# Altium PCB 1.PcbDoc
Units mm, origin at the board's own origin, x right, y up, seen from the top; angles counter-clockwise.
Board outline 89.03 x 17.27 mm, 2 copper layers (Top Layer, Bottom Layer); 10 components, 9 nets, 31 pads, 0 vias.
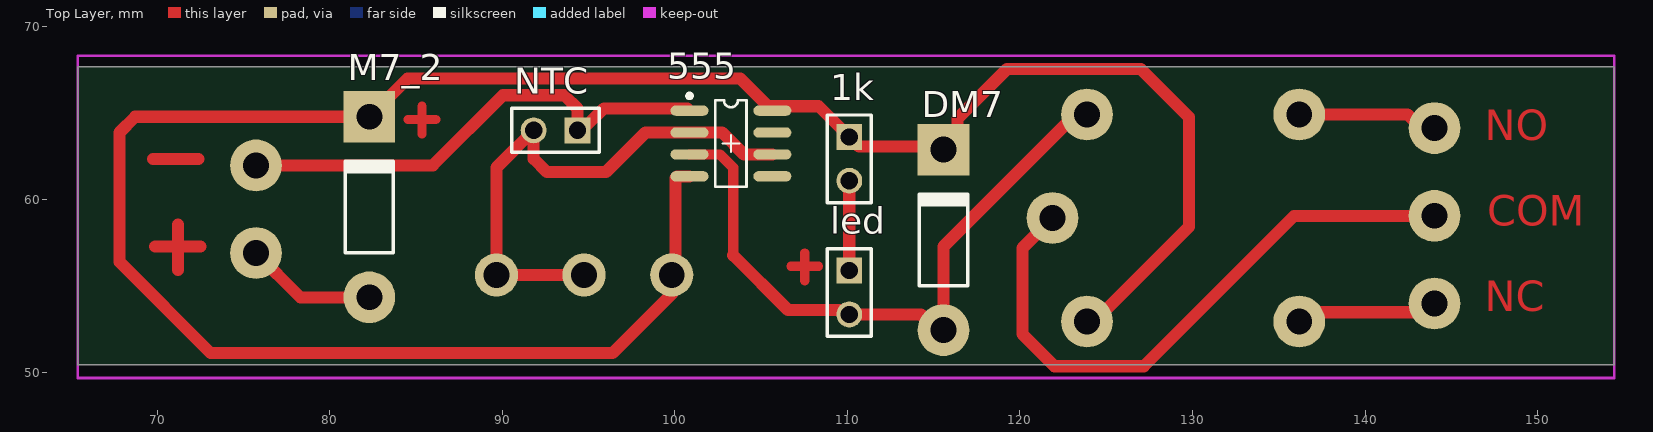
[diagram p0: Top Layer view]
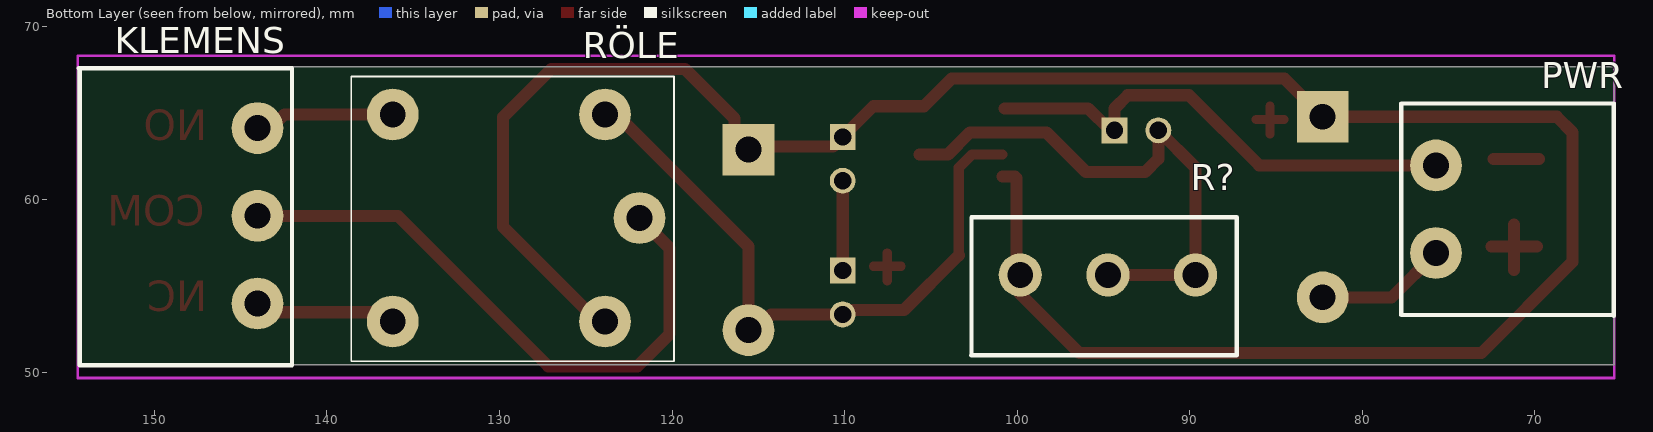
[diagram p1: Bottom Layer view, seen from below]
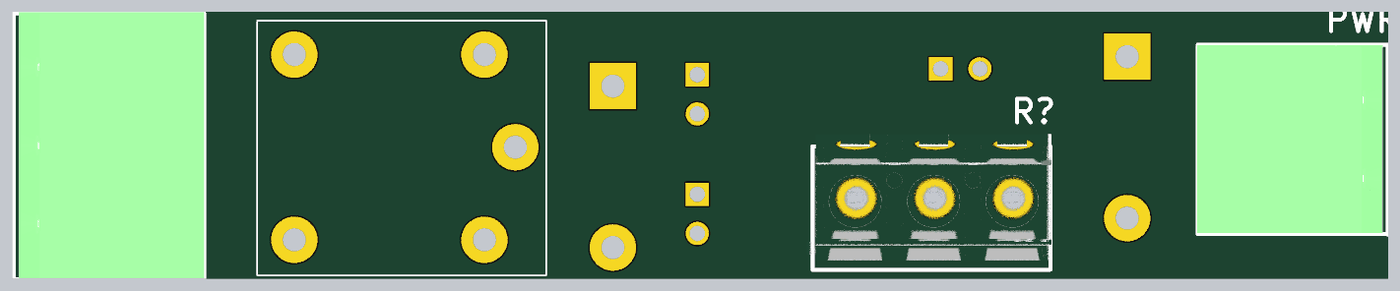
[diagram p2: 3D render of the assembled board from below, using the file's embedded part models]

## Layer stack, top to bottom
Top Solder: solder mask 0.0102, Solder Resist, Dk 3.5
Top Layer: signal copper 0.0356
Dielectric 1: dielectric 0.32, FR-4, Dk 4.8
Bottom Layer: signal copper 0.0356
Bottom Solder: solder mask 0.0102, Solder Resist, Dk 3.5

## Board outline
65.405,50.419 154.432,50.419 154.432,67.691 65.405,67.691

## Design rules (kind name [scope] priority, off if disabled: settings)
Clearance [All] p1: gap=0.254 ignorepadtopadclearanceinfootprint=FALSE except(0: Arc-Hole Track-Hole SMDPad-Hole THPad-Hole Via-Hole Fill-Hole Poly-Hole Region-Hole Text-Hole)
PolygonConnect [All] p1: connectstyle=Relief reliefconductorwidth=0.254 reliefentries=4 polygonreliefangle="90 Angle" airgapwidth=0.254
RoutingVias [All] p1: holewidth=0.711 width=1.27 viastyle="Through Hole" minholewidth=0.711 minwidth=1.27 maxholewidth=0.711 maxwidth=1.27
SolderMaskExpansion [All] p1: expansion=0.102
Width [All] p1: maxlimit=1 minlimit=0.3 preferedwidth=0.5 minimp=50.000000 maximp=50.000000 favimp=50.000000
30 further rules are at their usual default settings.

## Components (designator, comment, footprint, x,y, rotation, side; value= is the part's Value field where it differs from the comment)
1k "Header 2" HDR1X2 110.109,63.627 r270 top
555 "=Value" SOIC8 103.251,63.246 r270 top
DM7 "Diode 1N4004" DO-41 115.57,57.658 r90 top
KLEMENS "Header 3" "3R 5.08 Geçmeli Klemens" 144.018,59.055 r0 bottom
led "Header 2" HDR1X2 110.109,55.88 r270 top
M7_2 "Diode 1N4004" DO-41 82.296,59.563 r90 top
NTC "Header 2" HDR1X2 94.361,64.008 r180 top
PWR "Header 2" "2R 5.08 GEÇMELÝ" 73.66,59.436 r0 bottom
R? "10K" "3r 5.08 o nolu" 94.742,55.626 r0 bottom
RÖLE "=Value" "RELAY KUP" 129.032,58.928 r0 bottom

## Footprints (in the part's own frame and the unit in brackets; to place one, negate y for a bottom-side part, rotate by r counter-clockwise, add the part's x,y. Pads: shape width x height; smd on the part's side, far side on the other; paste and mask are expansions set on the pad)
"2R 5.08 GEÇMELÝ" [mm]
  round 3 hole 1.5: 1(2.075,-2.54) 2(2.075,2.54)
  silkscreen extent -8.23,-6.13 4.08,6.17, body extent -7.9,-6.08 4.1,6.08, height 8.6
"3R 5.08 Geçmeli Klemens" [mm]
  round 3 hole 1.5: 1(0,5.08) 2(0,0) 3(0,-5.08)
  silkscreen extent -2,-8.54 10.35,8.67, body extent -2,-8.62 10,8.62, height 8.6
"3r 5.08 o nolu" [mm]
  round 2.5 hole 1.5: 1(5.08,0) 2(0,0) 3(-5.08,0)
  silkscreen extent -7.47,-3.36 7.91,4.64, body extent -7.54,-4.15 8.3,4.05, height 10.25
DO-41 [mm] "Diode, Axial; Body 5.2 x 2.7 mm (LxDia. max), Lead Dia. 0.86 mm (max)"
  round 3 hole 1.5: 1(-5.23,0)
  rect 3x3 hole 1.5: 2(5.23,0)
  silkscreen extent -2.65,-1.4 2.75,1.4
HDR1X2 [mm] "Connector; Header; 2 Position"
  rect 1.5x1.5 hole 1: 1(0,0)
  round 1.5 hole 1: 2(2.54,0)
  silkscreen extent -1.27,-1.27 3.81,1.27
"RELAY KUP" [mm]
  round 3 hole 1.5: 1(-7.15,0) 2(7.15,6) 3(7.15,-6) 4(-5.15,-6) 5(-5.15,6)
  silkscreen extent -9.15,-8.2 9.55,8.3, body extent -9.1,-8.15 9.5,8.25, height 15
SOIC8 [mm]
  oval 0.6x2.2 smd: 1(-1.905,-2.4) 2(-0.635,-2.4) 3(0.635,-2.4) 4(1.905,-2.4) 5(1.905,2.4) 6(0.635,2.4) 7(-0.635,2.4) 8(-1.905,2.4)
  silkscreen extent -2.88,-2.52 2.5,0.9, body extent -2.43,-3.02 2.47,2.98, height 1.7

## Part data
1k led NTC PWR: "Header, 2-Pin", LatestRevisionDate=17-Jul-2002, LatestRevisionNote="Re-released for DXP Platform.", Publisher="Altium Limited"
555: library part H11IS0001, "NE555 IC-555 TIMER SMD SOIC8 ENTEGRE (ST-TEXAS-UTC)", Cari=H11IS0001, Component Name=NE555_SOIC8, Type=SMD
DM7 M7_2: "1 Amp General Purpose Rectifier", Code_JEDEC=DO-204-AL, ComponentLink1Description="Manufacturer Link", ComponentLink1URL=http://www.fairchildsemi.com/, ComponentLink2Description=Datasheet, ComponentLink2URL=http://www.fairchildsemi.com/ds/1N%2F1N4001.pdf, DatasheetVersion=1998, LatestRevisionDate=17-Jul-2002, LatestRevisionNote="Re-released for DXP Platform.", PackageDescription="Diode, Axial; Body 5.2 x 2.7 mm (LxDia. max), Lead Dia. 0.86 mm (max)", PackageReference=DO-41, PackageVersion=Aug-1999, Published=8-Jun-2000, Publisher="Altium Limited"
KLEMENS: "Header, 3-Pin", LatestRevisionDate=17-Jul-2002, LatestRevisionNote="Re-released for DXP Platform.", Publisher="Altium Limited"
R?: library part H11TP0009, "Trimpot 10MM 10K Ok Baþlý Dik 180°", Cari=H11TP0009, Component Name=10K_DIP_POT180°, Type=DIP
RÖLE: library part H11RL0001, "12V Küp Röle ( TIANBO-QUANJI-ZOFR)", Cari=H11RL0001, Component Name=12VKUP_DIPROLE, Type=DIP

## Nets (pads, with @x,y where several pads share a name; then routed paths per layer and width w, separated by ;. In a path a pad name is that pad's centre, name@x,y a point inside that pad or via, vN(x,y) a via of type N, cw(c..) or ccw(c..) an arc to the next point about the centre after c; other vN are vias at no path point)
GND: 555.1 NTC.1 PWR.1 | length 28.8
  Top Layer w0.7: PWR.1 85.979,61.976 90.043,66.04 93.599,66.04 94.361,65.278 NTC.1 94.615,64.008 95.892,65.285 555.1@100.717,65.285
Net1k_1: 1k.1 555.4 555.8 DM7.2 M7_2.2 R?.1 RÖLE.5 | length 134
  Top Layer w0.7: 555.4 100.133,61.341 100.032,61.24 100.032,55.836 R?.1 99.822,54.527 96.393,51.098 73.108,51.098 67.818,56.388 67.818,63.881 68.73,64.793 M7_2.2 84.515,67.012 103.79,67.012 105.397,65.405 105.651,65.405 108.331,65.405 1k.1 110.669,63.067 115.391,63.067 DM7.2 116.38,63.698 116.38,64.691 119.253,67.564 127,67.564 129.794,64.77 129.794,58.42 124.302,52.928 RÖLE.5
Net1k_2: 1k.2 led.1 | length 5.2
  Top Layer w0.7: led.1 1k.2
Net555_2: 555.2 555.6 NTC.2 R?.2 R?.3 | length 31.6
  Top Layer w0.7: R?.2 R?.3 89.662,61.849 NTC.2 91.821,62.357 92.583,61.595 96.012,61.595 98.298,63.881 555.2 102.743,63.881 104.013,62.611 555.6
Net555_3: 555.3 DM7.1 led.2 RÖLE.4 | length 38.2
  Top Layer w0.6: 555.3 102.616,62.611 103.378,61.849 103.378,56.769
  Top Layer w0.7: 103.378,56.769 106.553,53.594 109.552,53.594 109.806,53.34 led.2 114.26,53.34 115.172,52.428 DM7.1 115.57,57.277 123.221,64.928 RÖLE.4
NetKLEMENS_1: KLEMENS.3 RÖLE.3 | length 8.2
  Top Layer w0.7: RÖLE.3 142.463,64.928 143.256,64.135 KLEMENS.3
NetKLEMENS_2: KLEMENS.2 RÖLE.1 | length 35.7
  Top Layer w0.7: RÖLE.1 120.142,57.188 120.142,52.197 122.003,50.336 127.171,50.336 135.89,59.055 KLEMENS.2
NetKLEMENS_3: KLEMENS.1 RÖLE.2 | length 8.3
  Top Layer w0.7: RÖLE.2 136.721,53.467 142.801,53.467 143.309,53.975 KLEMENS.1
NetM7_2_1: M7_2.1 PWR.2 | length 7.6
  Top Layer w0.7: PWR.2 78.298,54.333 M7_2.1
pads on no net: 555.5 555.7
copper on no net: | length 14.3
  Top Layer w0.53: 84.54,64.643 86.148,64.643 ; 85.344,63.797 85.344,65.405 ; 106.723,56.134 108.331,56.134 ; 107.527,55.288 107.527,56.896
  Top Layer w0.7: 69.766,62.357 72.39,62.357 ; 69.893,57.277 72.517,57.277 ; 71.205,55.923 71.205,58.547

## Keep-outs
Keep-Out Layer:
  lines w0.15: 65.405,49.657 65.405,68.326 154.432,68.326 154.432,49.657 65.405,49.657

## Other copper
Top Layer:
  text "." at 98.679,66.04 h4
  text "NO" at 146.939,62.865 h3
  text "COM" at 147.066,57.912 h3
  text "NC" at 146.939,52.959 h3